# Altium PCB ADV7180.PcbDoc
Units mil, origin at the board's own origin, x right, y up, seen from the top; angles counter-clockwise.
Board outline 1800 x 895 mil, 2 copper layers (Top Layer, Bottom Layer); 53 components, 35 nets, 185 pads, 80 vias.
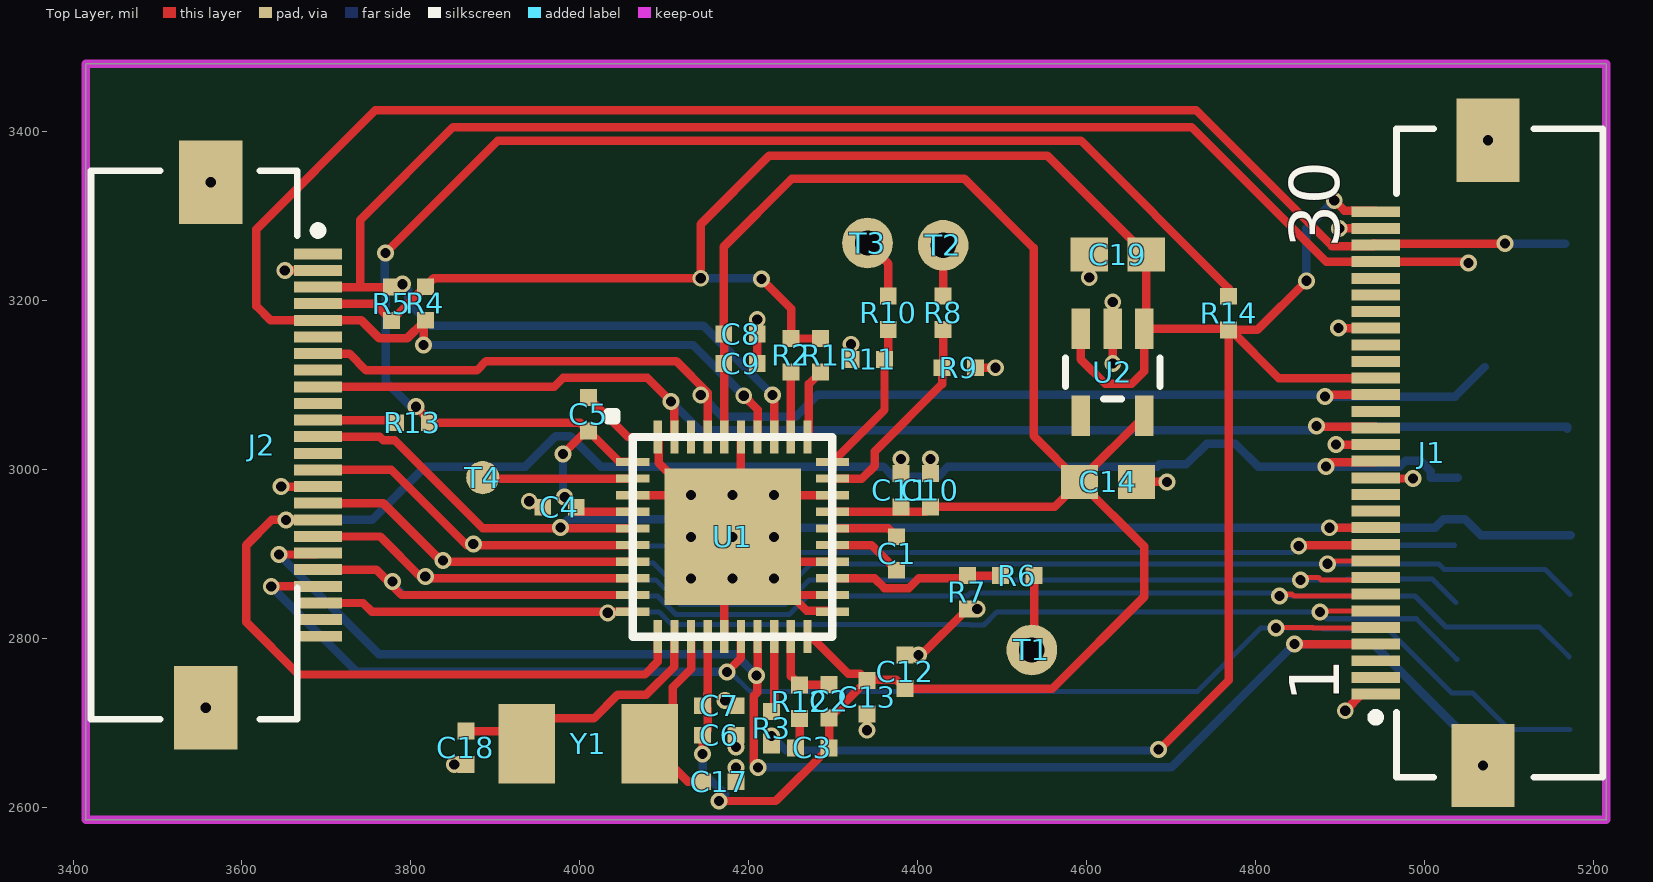
[diagram p0: Top Layer view]
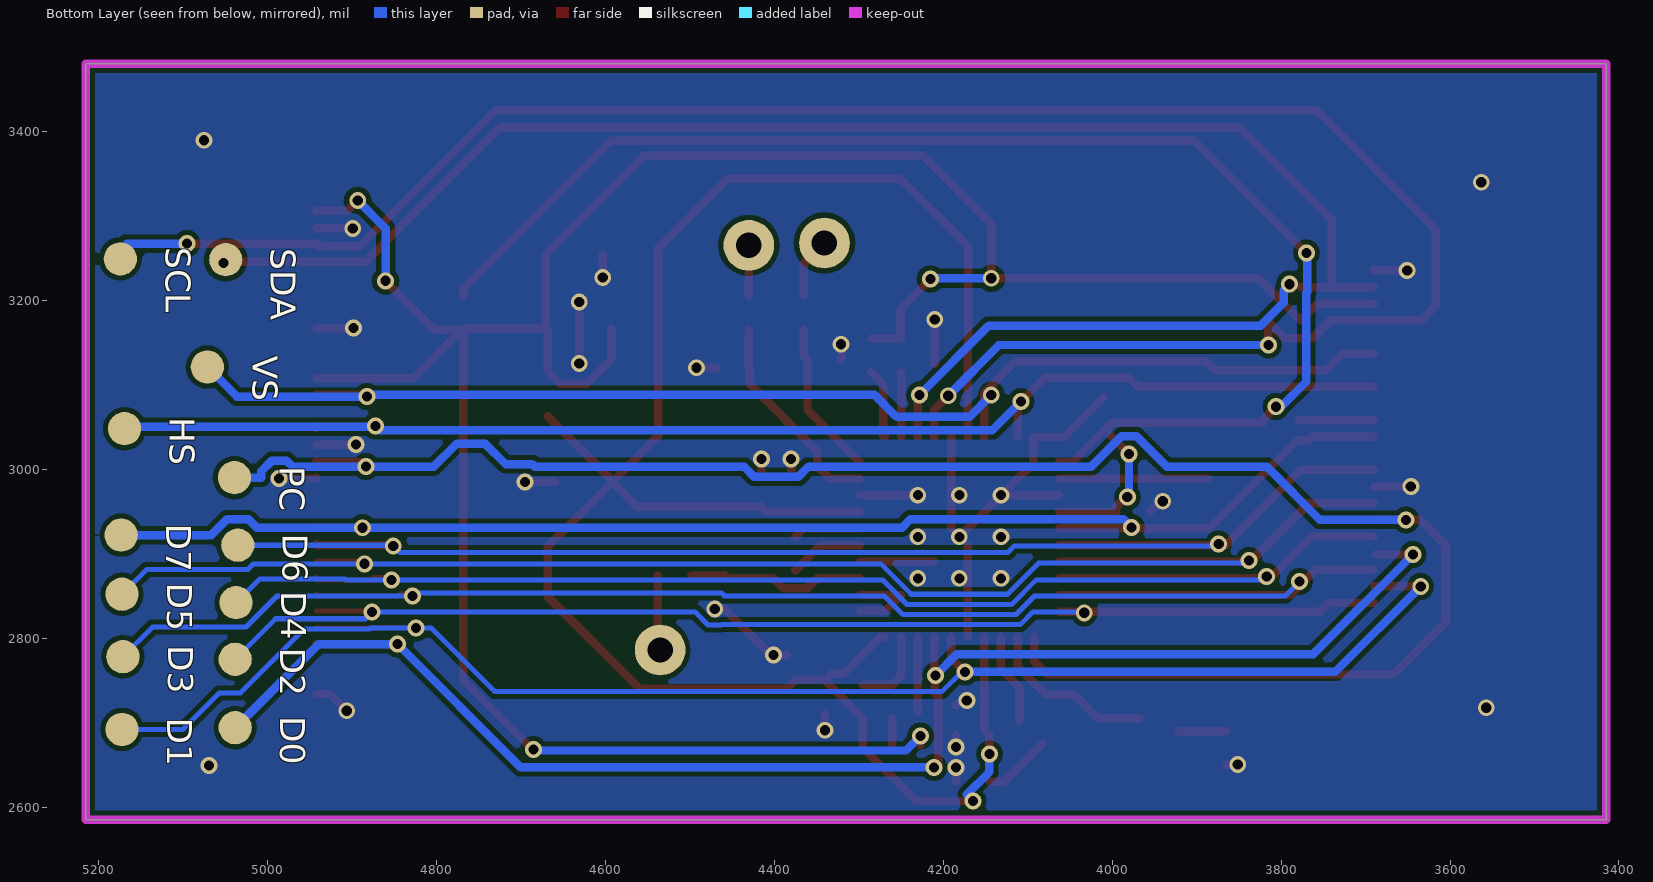
[diagram p1: Bottom Layer view, seen from below]

## Layer stack, top to bottom
Top Solder: solder mask 0.4, Solder Resist, Dk 3.5
Top Layer: signal copper 1.4
Dielectric 1: dielectric 12.6, FR-4, Dk 4.8
Bottom Layer: signal copper 1.4
Bottom Solder: solder mask 0.4, Solder Resist, Dk 3.5

## Board outline
3415,2585 5215,2585 5215,3480 3415,3480

## Design rules (kind name [scope] priority, off if disabled: settings)
Clearance [All] p1: gap=6
PolygonConnect [All] p1: connectstyle=Direct reliefconductorwidth=10 reliefentries=4 polygonreliefangle="90 Angle" airgapwidth=10
RoomDefinition ADV7180 [InComponentClass('ADV7180')] p1: confinementstyle=ConfineIn formatcopy=TRUE lockcomponents=FALSE outline 8380,2080 7505,2080 7505,500 8380,500
RoutingVias [All] p1: holewidth=28 width=50 viastyle="Through Hole" minholewidth=12 minwidth=20 maxholewidth=28 maxwidth=50
SolderMaskExpansion [All] p1: expansion=4
UnpouredPolygon [All] p1: allowunpoured=FALSE
Width [All] p1: maxlimit=10 minlimit=6 preferedwidth=10
29 further rules are at their usual default settings.

## Components (designator, comment, footprint, x,y, rotation, side; value= is the part's Value field where it differs from the comment)
C1 "0.1uF" 0402 4375,2900 r90 top
C2 "10nF" 0402 4295,2725 r90 top
C3 "82nF" 0402 4275,2670 r180 top
C4 "0.1uF" 0402 3976,2955 r180 top
C5 "10nF" 0402 4010,3065 r90 top
C6 "0.1uF" 0402 4165,2685 r0 top
C7 "10nF" 0402 4165,2720 r0 top
C8 "0.1uF" 0402 4190,3160 r0 top
C9 "10nF" 0402 4190,3125 r0 top
C10 "0.1uF" 0402 4415,2975 r90 top
C11 "10nF" 0402 4380,2975 r90 top
C12 "0.1uF" 0402 4385,2760 r90 top
C13 "10nF" 0402 4340,2730 r270 top
C14 "4.7uF" 0603 4625,2985 r0 top
C17 "47pF" 0402 4165,2630 r180 top
C18 "47pF" 0402 3865,2670 r90 top
C19 "4.7uF" 0603 4637,3254 r180 top
D0 "TestPad" "TestPad - 1mm" 5038,2694 r270 bottom
D1 "TestPad" "TestPad - 1mm" 5172,2692 r270 bottom
D2 "TestPad" "TestPad - 1mm" 5038,2775 r270 bottom
D3 "TestPad" "TestPad - 1mm" 5171,2778 r270 bottom
D4 "TestPad" "TestPad - 1mm" 5037,2842 r270 bottom
D5 "TestPad" "TestPad - 1mm" 5172,2852 r270 bottom
D6 "TestPad" "TestPad - 1mm" 5035,2910 r270 bottom
D7 "TestPad" "TestPad - 1mm" 5173,2922 r270 bottom
HS "TestPad" "TestPad - 1mm" 5169,3048 r270 bottom
J1 "746Camera" FFC/SM0.5-2H30 5070,3020 r90 top
J2 "Camera24P" FFC/SM0.5-2H24 3690,3255 r270 top
PC "TestPad" "TestPad - 1mm" 5039,2990 r270 bottom
R1 "10k" 0402 4285,3135 r270 top
R2 "10k" 0402 4250,3135 r270 top
R3 "10k" 0402 4227,2693 r90 top
R4 "10k" 0402 3817,3196 r90 top
R5 "10k" 0402 3777,3196 r270 top
R6 "36R" 0402 4517.72,2874.02 r0 top
R7 "39R" 0402 4458.66,2854.33 r90 top
R8 "36R" 0402 4430,3185 r90 top
R9 "39R" 0402 4448.82,3120.08 r180 top
R10 "36R" 0402 4365,3185 r90 top
R11 "39R" 0402 4340.55,3129.92 r0 top
R12 "1.69k" 0402 4260,2725 r270 top
R13 "0R/NC" 0402 3802,3055 r180 top
R14 "0R/NC" 0402 4768,3185 r270 top
SCL "TestPad" "TestPad - 1mm" 5174,3249 r180 bottom
SDA "TestPad" "TestPad - 1mm" 5049.21,3248.03 r180 bottom
T1 "TestPad" TestPad 4535,2786 r90 top
T2 "TestPad" TestPad 4430,3265 r90 top
T3 "TestPad" TestPad 4340.55,3267.72 r0 top
T4 "TestPad" "TestPad - 1mm" 3885,2990 r0 top
U1 "ADV7180-40P" "ADV7180 - 40LFCSP" 4180.79,2920 r0 top
U2 "RT9013-1.8" SOT23-5 4630.79,3115 r180 top
VS "TestPad" "TestPad - 1mm" 5071,3121 r270 bottom
Y1 "XTAL" 5032-crystal 4010,2675 r0 top

## Footprints (in the part's own frame and the unit in brackets; to place one, negate y for a bottom-side part, rotate by r counter-clockwise, add the part's x,y. Pads: shape width x height; smd on the part's side, far side on the other; paste and mask are expansions set on the pad)
0402 [mil] "0402-RES"
  rect 20x20 smd: 1(-19.68,0) 2(20,0)
0603 [mil] "0603-RES"
  rect 44x40 smd: 1(-33.46,0) 2(34,0)
5032-crystal [mm]
  rect 1.7x2.4 smd: 1(-1.85,0) 2(1.85,0)
  body extent -2.54,-1.65 2.54,1.65, height 1.2
"ADV7180 - 40LFCSP" [mm]
  rect 4.1x4.1 smd: 0(0,0)
  rect 1x0.25 smd: 1(-3,2.25) 2(-3,1.75) 3(-3,1.25) 4(-3,0.75) 5(-3,0.25) 6(-3,-0.25) 7(-3,-0.75) 8(-3,-1.25) 9(-3,-1.75) 10(-3,-2.25) 21(3,-2.25) 22(3,-1.75) 23(3,-1.25) 24(3,-0.75) 25(3,-0.25) 26(3,0.25) 27(3,0.75) 28(3,1.25) 29(3,1.75) 30(3,2.25)
  rect 0.25x1 smd: 11(-2.25,-3) 12(-1.75,-3) 13(-1.25,-3) 14(-0.75,-3) 15(-0.25,-3) 16(0.25,-3) 17(0.75,-3) 18(1.25,-3) 19(1.75,-3) 20(2.25,-3) 31(2.25,3) 32(1.75,3) 33(1.25,3) 34(0.75,3) 35(0.25,3) 36(-0.25,3) 37(-0.75,3) 38(-1.25,3) 39(-1.75,3) 40(-2.25,3)
  silkscreen extent -3.75,-3 3,3.75
FFC/SM0.5-2H24 [mm]
  rect 2.5x1.9 smd: 0(-2.15,-3.225) 0(13.65,-3.375)
  rect 0.33x1.45 smd: 1(0,0) 2(0.5,0) 3(1,0) 4(1.5,0) 5(2,0) 6(2.5,0) 7(3,0) 8(3.5,0) 9(4,0) 10(4.5,0) 11(5,0) 12(5.5,0) 13(6,0) 14(6.5,0) 15(7,0) 16(7.5,0) 17(8,0) 18(8.5,0) 19(9,0) 20(9.5,0) 21(10,0) 22(10.5,0) 23(11,0) 24(11.5,0)
  silkscreen extent -2.5,-6.83 14,0.13, body extent -2.46,-6.83 14,-0.66, height 2
FFC/SM0.5-2H30 [mm]
  rect 0.33x1.45 smd: 1(-7.268,3.252) 2(-6.768,3.252) 3(-6.268,3.252) 4(-5.768,3.252) 5(-5.268,3.252) 6(-4.768,3.252) 7(-4.268,3.252) 8(-3.768,3.252) 9(-3.268,3.252) 10(-2.768,3.252) 11(-2.268,3.252) 12(-1.768,3.252) 13(-1.268,3.252) 14(-0.768,3.252) 15(-0.268,3.252) 16(0.232,3.252) 17(0.732,3.252) 18(1.232,3.252) 19(1.732,3.252) 20(2.232,3.252) 21(2.732,3.252) 22(3.232,3.252) 23(3.732,3.252) 24(4.232,3.252) 25(4.732,3.252) 26(5.232,3.252) 27(5.732,3.252) 28(6.232,3.252) 29(6.732,3.252) 30(7.232,3.252)
  rect 2.5x1.9 smd: 31(-9.418,0.027) 32(9.382,-0.123)
  silkscreen extent -9.77,-3.57 9.73,3.38, body extent -9.77,-3.57 9.73,2.63, height 2
SOT23-5 [mil] "SOT23-5"
  rect 22x48 smd: 1(-37.4,-51.19) 2(0,-51.19) 3(38,-51.19) 4(38,52) 5(-37.4,52)
  silkscreen extent -56,-17 56,32
TestPad [mil]
  round 60 hole 30: 1(0,0)
"TestPad - 1mm" [mm]
  round 1 smd: 1(0,0)

## Part data
C1 C2 C3 C4 C5 C6 C7 C8 C9 C10 C11 C12 C13 C14 C17 C18 C19: library part Cap, "Capacitor"
R1 R2 R3 R4 R5 R6 R7 R8 R9 R10 R11 R12 R13 R14: library part Res2, "Resistor"
U2: library part LP5907
Y1: "Crystal Oscillator"

## Via types
v1: diameter 20, hole 12, Top Layer to Bottom Layer, 71 vias
v2: diameter 19.68, hole 11.81, Top Layer to Bottom Layer, 9 vias

## Nets (pads, with @x,y where several pads share a name; then routed paths per layer and width w, separated by ;. In a path a pad name is that pad's centre, name@x,y a point inside that pad or via, vN(x,y) a via of type N, cw(c..) or ccw(c..) an arc to the next point about the centre after c; other vN are vias at no path point)
1.8: C2.1 C3.1 C6.1 C7.1 C8.1 C9.1 C10.1 C11.1 C12.1 C13.1 C14.1 U1.14 U1.20 U1.27 U1.36 U2.5 | length 2478.4
  Top Layer w10: v1(4145.31,2662.68) C6.1 4151.26,2690.94 4151.26,2717.04 4151,2717.3 4151,2734.7 4151.26,2734.96 U1.14 ; v1(4164.84,2607.22) 4231.9,2607.22 C3.1 ; U1.36 4170.94,3159.37 C8.1 4170.31,3263.32 4251,3344 4455,3344 4537,3262 4537,3039.54 C14.1 ; U1.20 4273.67,2801.89 4317.56,2758 4331.69,2758 C13.1 ; C3.1@4295,2670.32 C2.1 4295.63,2705.32 C13.1 ; U1.27 4409.21,2949.53 C10.1 4561.85,2955.32 C14.1 ; C14.1@4591.54,2986.35 U2.5 ; C13.1 4341.31,2751 4374.31,2751 C12.1 4559.31,2740.32 4668,2849 4668,2908.54 C14.1
  Bottom Layer w10: v1(4145.31,2662.68) 4145.31,2641.68 4172,2615 4164.84,2607.84 v1(4164.84,2607.22)
AIN1: R6.1 R7.2 U1.23 | length 209.8
  Top Layer w10: U1.23 4348.97,2870.79 4360.44,2859.32 4389.56,2859.32 4401.03,2870.79 4455.12,2870.79 R7.2 ; R7.2@4458.98,2874.02 R6.1
AIN2: R8.1 R9.2 U1.29 | length 249.6
  Top Layer w10: U1.29 4333.9,2988.9 4349,3004 4349,3021 4428.82,3100.82 R9.2 ; R9.2@4430,3121.26 R8.1
AIN3: R10.1 R11.2 U1.30 | length 177.8
  Top Layer w10: U1.30 4360.55,3070.24 R11.2 ; R11.2@4365,3134.37 R10.1
DOVDD: J2.11 R13.2 | length 88.8
  Top Layer w10: J2.11 R13.2@3778.85,3058.15
GND: C4.2 C5.2 C6.2 C7.2 C8.2 C9.2 C10.2 C11.2 C12.2 C13.2 C14.2 C17.1 C18.1 C19.2 J1.1 J1.14 J1.16 J1.23 J1.29 J1.31 J1.32 J2.0 J2.2 J2.15 R7.1 R9.1 R11.1 U1.0 U1.3 U1.15 U1.21 U1.22 U1.24 U1.28 U1.35 U1.40 U2.2 | length 1581.8
  Top Layer w10: v1(3646.41,2979.41) J2.15 ; v1(3650.69,3235.31) J2.2 ; v1(3851.32,2650.32) C18.1 ; v1(3940,2962) 3943,2962 C4.2@3955,2950 ; C5.2 4056.89,3038.11 U1.40 4093.36,3036.95 4093.36,3007.43 v2(4131.57,2969.21) ; U1.3 v2(4131.57,2969.21) ; U1.15 U1.0@4170.94,2910.16 ; v1(4172,2726) 4179,2726 C7.2 ; v2(4180.79,2920) v2(4131.57,2969.21) ; C17.1 v1(4184.69,2646.68) ; v1(4185,2671) C6.2 ; U1.0@4190.63,2929.84 U1.35 ; C9.2 C8.2 v1(4210,3177) ; U1.0@4210.31,2890.47 U1.24 ; v2(4230,2969.21) U1.28 ; U1.21 4298.9,2832.57 4268.21,2832.57 4249.69,2851.1 U1.22 ; R11.1 v1(4320.87,3147.87) ; v1(4340,2691) C13.2 ; C11.2 v1(4380,3012) ; C12.2 v1(4401,2780) 4404.02,2780 R7.1 v1(4470.35,2834.65) ; C10.2 v1(4415,3012) ; R9.1 v1(4491.92,3120.08) ; v1(4603,3227) C19.2 ; v1(4630.79,3125.21) U2.2 v1(4630.79,3197.79) ; C14.2 v1(4695,2985) ; v1(4894.85,3029.15) J1.16 ; v1(4898.06,3166.94) J1.23 ; v1(4898.95,3285.05) J1.29 ; v1(4906,2714) 4925.87,2733.87 J1.1 ; J1.14 4942.74,2989 v1(4986,2989)
  other v1: 5068.93,2649.23 3557.13,2717.6 3563.03,3339.65 5074.83,3389.39
  other v2: 4131.57,2870.79 4180.79,2870.79 4230,2870.79 4131.57,2920 4230,2920 4180.79,2969.21
NetC1_1: C1.1 U1.25 | length 88.5
  Top Layer w10: U1.25 4345.16,2910.16 C1.1
NetC1_2: C1.2 U1.26 | length 80.2
  Top Layer w10: U1.26 4365.16,2929.84 C1.2
NetC2_2: C2.2 R12.1 U1.19 | length 96.3
  Top Layer w10: U1.19 4249.69,2755 4259.69,2745 C2.2
NetC3_2: C3.2 R12.2 | length 30
  Top Layer w10: C3.2@4260,2675 R12.2
NetC17_2: C17.2 U1.13 Y1.2 | length 189.5
  Top Layer w10: Y1.2 4127.83,2630 C17.2 ; Y1.2@4110,2702.17 4110,2742 4131.57,2763.57 U1.13
NetC18_2: C18.2 U1.12 Y1.1 | length 262.7
  Top Layer w10: C18.2 Y1.1@3922.17,2690 ; Y1.1@3967.17,2705 4016.57,2705 4044.81,2733.24 4078.62,2733.24 4111.89,2766.52 U1.12
NetD0_1: D0.1 J1.4 J2.19 U1.17 | length 1860
  Top Layer w10: v1(3644,2899) J2.19@3688.33,2899 ; v1(4209,2756) v1@4210,2756 ; U1.17 4210.31,2756.31 v1@4210,2756 ; v1(4211,2647) 4206,2652 4206,2731.56 4210,2735.56 v1@4210,2756 ; v1(4845.93,2792.93) J1.4
  Bottom Layer w10: v1(3644,2899) 3762,2781 4184,2781 v1(4209,2756) v1@4206,2753 ; v1@4208,2647 v1(4211,2647) 4700,2647 v1(4845.93,2792.93) 4939.07,2792.93 D0.1
NetD1_1: D1.1 J1.5 J2.21 U1.16 | length 1892.9
  Top Layer w6: v1(4824,2812) 4824.39,2812.39 4824.39,2812.61 4867.52,2812.61 4868.13,2812 4941.96,2812 J1.5
  Top Layer w10: v1(3634.7,2861.3) J2.21 ; v1(4174,2760) 4190.63,2776.63 U1.16
  Bottom Layer w6: v1(4174,2760) 4178.13,2760 4201.13,2737 4731,2737 4806,2812 v1(4824,2812) 4878.03,2812 4879.03,2811 4956,2811 5032,2735 5057,2735 5100,2692 D1.1
  Bottom Layer w10: v1(3634.7,2861.3) 3736,2760 v1(4174,2760)
NetD2_1: D2.1 J1.6 J2.22 U1.10 | length 1485.9
  Top Layer w6: v1(4876,2831) 4876,2832 4876.3,2832.3 J1.6
  Top Layer w10: J2.22 3743.39,2841.61 3753.58,2831.42 U1.10
  Bottom Layer w6: v1(4033,2830) 4033,2831 4093.8,2831 4108.86,2815.94 4462.19,2815.94 4462.48,2815.65 4478.22,2815.65 4493.58,2831 v1(4876,2831) 4884,2823 4990,2823 D2.1
NetD3_1: D3.1 J1.7 J2.20 U1.9 | length 1955
  Top Layer w6: v1(4828,2850) 4827.98,2851.98 4843.15,2851.98 4845.13,2850 4941.96,2850 J1.7
  Top Layer w10: J2.20 3759.01,2880.99 3788.9,2851.1 U1.9
  Bottom Layer w6: v1(3778,2867) 3795,2850 4091.77,2850 4113.83,2827.94 4247.75,2827.94 4269.8,2850 4458.84,2850 4462.48,2853.65 4824.35,2853.65 v1(4828,2850) 4988.43,2850 5025.12,2813.31 5135.69,2813.31 D3.1
NetD4_1: D4.1 J1.8 J2.18 U1.8 | length 1754.8
  Top Layer w6: v1@3813,2877 v1(3817,2873) ; v1(4853,2869) 4852.67,2869.33 4852.67,2871.67 4874.46,2871.67 4877.13,2869 4941.96,2869 J1.8
  Top Layer w10: J2.18 3763.64,2920.36 3813.21,2870.79 U1.8
  Bottom Layer w6: v1(3817,2873) 3817,2869 4089.74,2869 4118.8,2839.94 4242.78,2839.94 4271.83,2869 v1(4853,2869) 4907,2869 4908,2870 5009,2870 D4.1
NetD5_1: D5.1 J1.9 J2.16 U1.7 | length 1845.8
  Top Layer w6: v1(4885,2888) 4885,2891 4884.65,2891.35 J1.9
  Top Layer w10: J2.16 3767.28,2959.72 3836.53,2890.47 U1.7
  Bottom Layer w6: v1(3838,2892) 3838,2889 3838.14,2888.86 4086.86,2888.86 4123.77,2851.94 4237.8,2851.94 4273.86,2888 v1(4885,2888) ; v1@4884,2889 v1(4885,2888) ; D5.1 5142.69,2881.31 5023.12,2881.31 5016.43,2888 v1(4885,2888)
NetD6_1: D6.1 J1.10 J2.14 U1.6 | length 1663.6
  Top Layer w6: v1(3873.83,2911.47) v1@3874.36,2912
  Top Layer w10: J2.14 3776.91,2999.09 3865.84,2910.16 U1.6 ; v1@4857,2910 4878.3,2910 4878.58,2909.72 4895.97,2909.72 4896.25,2910 4940.92,2910 J1.10
  Bottom Layer w6: v1(3873.83,2911.47) 3876.3,2909 4115.93,2909 4123.77,2901.16 4843.16,2901.16 v1(4851,2909) ; v1@4852,2910 D6.1
NetD7_1: D7.1 J1.11 J2.12 U1.5 | length 1688.6
  Top Layer w10: J2.12 3762.98,3038.47 3767.44,3034 3781,3034 3885.16,2929.84 U1.5 ; v1@3976.9,2931.1 v1(3976.9,2931.16) ; v1(4887.28,2930.72) J1.11
  Bottom Layer w10: v1(3976.9,2931.16) 3986.59,2940.84 4238.63,2940.84 4248.75,2930.72 v1(4887.28,2930.72) 5012.33,2930.72 5022.29,2940.69 5047.71,2940.69 5066.4,2922 D7.1
NetHS_1: HS.1 J1.17 J2.9 U1.39 | length 1628.7
  Top Layer w10: J2.9 3969.52,3097.52 3980,3108 4080,3108 v1(4108,3080) 4111.89,3076.11 U1.39 ; v1(4872,3051) 4872.85,3050.15 4941.96,3050.15 J1.17
  Bottom Layer w10: v1(4108,3080) 4142,3046 4867,3046 v1(4872,3051) 4872.85,3050.15 5169,3050.15 HS.1
NetJ1_15: J1.15 J2.17 PC.1 U1.11 | length 2290.6
  Top Layer w10: J2.17 v1(3652.02,2940.04) 3635.04,2940.04 3605,2910 3605,2819 3667,2757 4077,2757 4092.2,2772.2 U1.11 ; v1(4883,3003) 4888.15,3008.15 4941.96,3008.15 J1.15
  Bottom Layer w10: v1(3652.02,2940.04) 3753.96,2940.04 3754,2940 3817,3003 3935.3,3003 3971.3,3039 3988.7,3039 4024.7,3003 4359.3,3003 4371.3,2991 4423.7,2991 4435.7,3003 4683.3,3003 4686.3,3006 4718.02,3006 4742.02,3030 4775.98,3030 4802.98,3003 v1(4883,3003) 4970.3,3003 4977.3,3010 4994.7,3010 5007,2997.7 5007,2990 PC.1
NetJ1_19: J1.19 J2.7 U1.37 VS.1 | length 1569.4
  Top Layer w10: J2.7 3727.11,3136.89 3747,3117 3878,3117 3889,3128 4114,3128 4151.26,3090.74 U1.37 ; v1(4882,3086) 4882,3088 4881.8,3088.2 J1.19
  Bottom Layer w10: v1(4143,3088) 4169,3062 4255,3062 4281,3088 4880,3088 v1(4882,3086) 5036,3086 VS.1
NetJ1_27: J1.27 J2.3 R5.1 SDA.1 U1.33 | length 2145.7
  Top Layer w10: J2.3 3740,3215.63 ; R5.1@3776.95,3215.63 3740,3215.63 ; v1(4228,3088) 4230,3088 U1.33 ; v1(5052,3244) 5051.68,3244.32 5051.68,3245.68 J1.27 4883.32,3245.68 4724,3405 3850,3405 3740,3295 3740,3215.63
  Bottom Layer w10: v1(3790,3219) 3797,3212 3797,3197 3824,3170 4146,3170 v1(4228,3088) ; v1(5052,3244) SDA.1@5053,3245
NetJ1_28: J1.28 J2.5 R4.1 SCL.1 U1.34 | length 2482.1
  Top Layer w10: v1(3815,3147) R4.1@3815,3174.32 ; R4.1 R4.1@3815,3174.32 ; v1(4194,3087) 4210.31,3070.68 U1.34 ; v1(5095,3267) 4943.59,3267 J1.28 4939.77,3267.56 4939.77,3264.05 4890.25,3264.05 4729.3,3425 3758,3425 3617,3284 3617,3193 3633.74,3176.26 J2.5 3741.18,3176.26 3762.44,3155 3795.68,3155 R4.1@3815,3174.32
  Bottom Layer w10: v1(3815,3147) 4134,3147 v1(4194,3087) ; v1(5095,3267) SCL.1@5166.61,3267
NetR1_2: R1.2 U1.31 | length 83.4
  Top Layer w10: U1.31 4271,3039.74 4271,3101 R1.2
NetR2_2: R2.2 U1.32 | length 77
  Top Layer w10: U1.32 4249.69,3114.69 R2.2
NetR3_2: R3.2 U1.18 | length 88.9
  Top Layer w10: R3.2@4230,2713 U1.18
NetR6_2: R6.2 T1.1 | length 85.3
  Top Layer w10: T1.1@4537.72,2788.72 R6.2
NetR8_2: R8.2 T2.1 | length 60
  Top Layer w10: R8.2 T2.1
NetR10_2: R10.2 T3.1 | length 72.8
  Top Layer w10: T3.1 4365,3243.27 R10.2
NetT4_1: T4.1 U1.2 | length 176.6
  Top Layer w10: T4.1@3886.1,2988.9 U1.2
NetU1_38: U1.38
VDDIO: C4.1 C5.1 R13.1 R14.1 U1.1 U1.4 | length 1807
  Top Layer w10: v1(3770,3256) 3903,3389 4593.02,3389 4768,3214.02 R14.1 ; v1(3806,3074) 3821.68,3058.32 R13.1 4000.32,3055 C5.1 ; v1(3980,3018) 4007.32,3045.32 C5.1 ; v1(3982,2967) 3981.68,2967.32 3981.68,2969 C4.1 ; C4.1@3995.16,2949.53 U1.4 ; U1.1 4046.73,3008.58 C5.1
  Bottom Layer w10: v1(3770,3256) 3769,3255 3769,3209.3 3770,3208.3 3770,3104 3803,3071 v1(3806,3074) ; v1(3980,3018) 3980,2969 v1(3982,2967)
VIN: C19.1 J1.20 J1.30 J2.4 R1.1 R2.1 R3.1 R4.2 R5.2 R14.2 U2.1 U2.3 | length 3199.5
  Top Layer w10: J2.4 3757.05,3195.95 R5.2 R4.2 3827,3226 v1(4143,3226) 4143,3290 4224,3371 4553.46,3371 C19.1 U2.1@4670.46,3168.46 ; v1(4215,3225) 4250,3190 R2.1 R1.1 ; R3.1 v1(4227,2684) ; U2.3 4592.79,3130.21 4622,3101 4653,3101 4668.19,3116.19 U2.1 4768.81,3166.19 R14.2@4770,3165 ; v1(4685,2668) 4686,2668 4768,2750 R14.2 R14.2@4770,3165 ; v1(4860,3223) 4802,3165 R14.2@4770,3165 ; v1(4893,3318) 4904.95,3306.05 4941.96,3306.05 J1.30 ; J1.20 4827.11,3107.89 R14.2@4770,3165
  Bottom Layer w10: v1(4143,3226) 4214,3226 v1(4215,3225) ; v1(4227,2684) 4244,2667 4685,2667 v1(4685,2668) ; v1(4860,3223) 4860,3285 v1(4893,3318)
pads on no net: J1.2 J1.3 J1.12 J1.13 J1.18 J1.21 J1.22 J1.24 J1.25 J1.26 J2.1 J2.6 J2.8 J2.10 J2.13 J2.23 J2.24 U2.4

## Polygon pours and split planes (outlines as drawn)
GND on Bottom Layer "Top Layer-No Net" (solid, remove dead copper, pour order 4): 3420,3474 5209,3474 5215,3480 5215,2585 3415,2585

## Keep-outs
Keep-Out Layer:
  the board outline again, w10

## Text inside footprints (layer, text, board x,y; h text height)
J1: Top Overlay "1" at 4898.65,2724.03 h59.06 r90; Top Overlay "30" at 4898.65,3261.43 h59.06 r90